# EAGLE board Fortuna-v21-OtherMill (EAGLE 8.1.0)
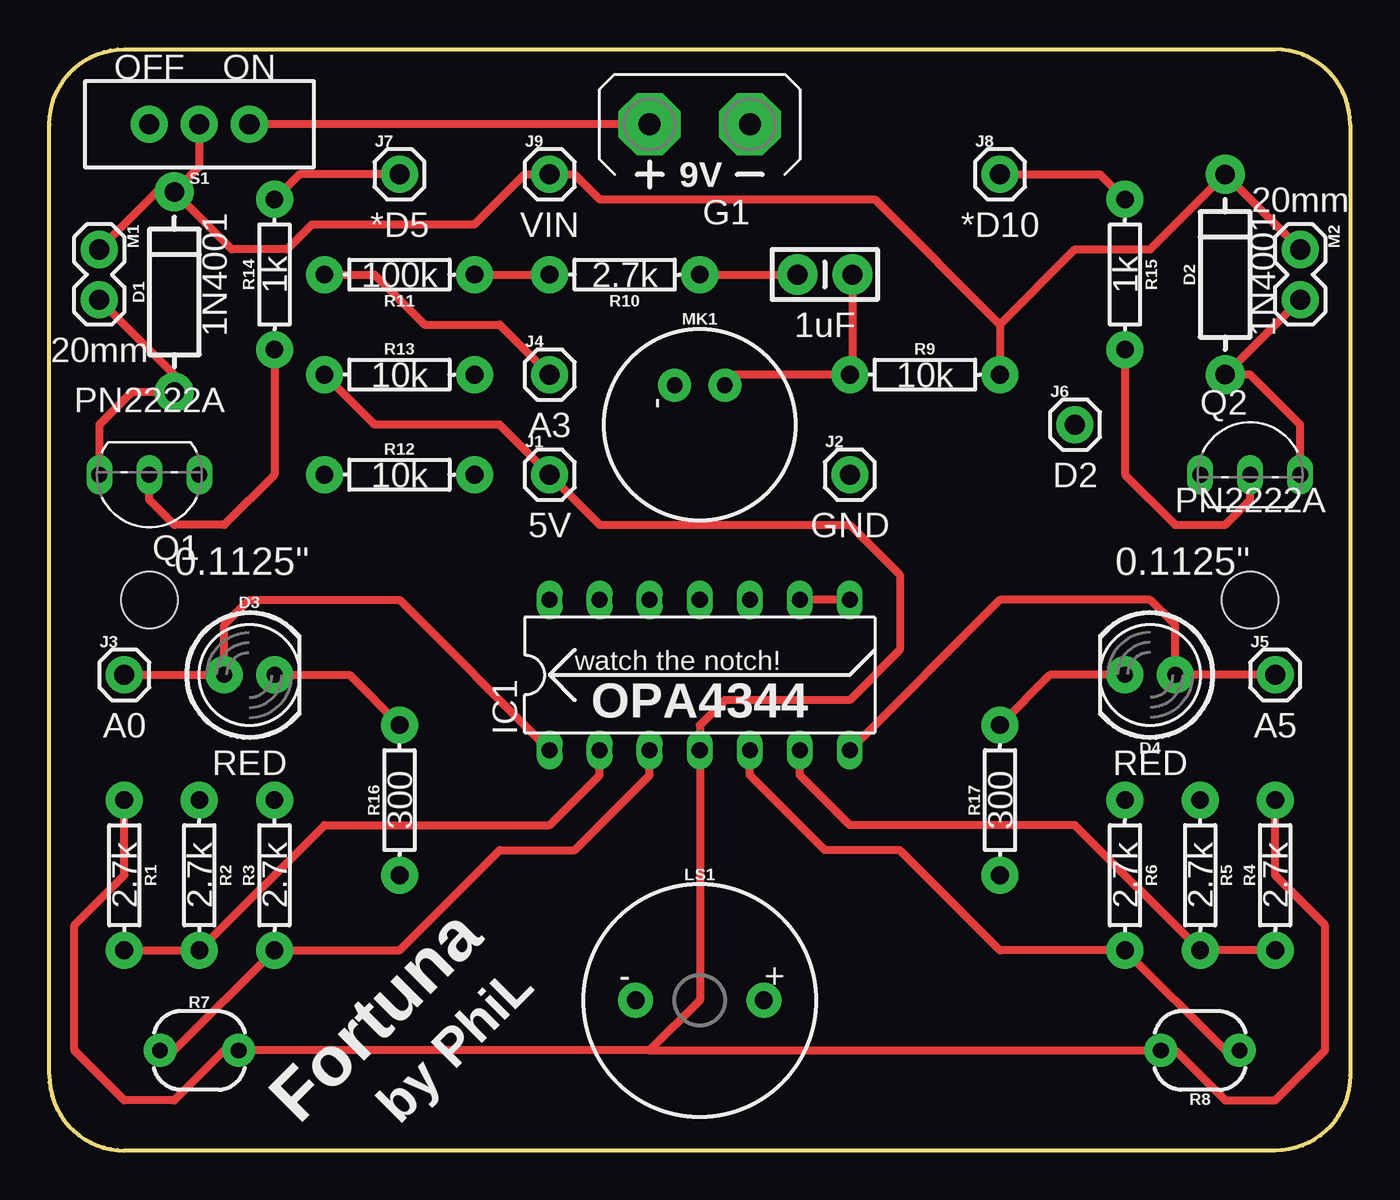
[diagram p0: board, top side]
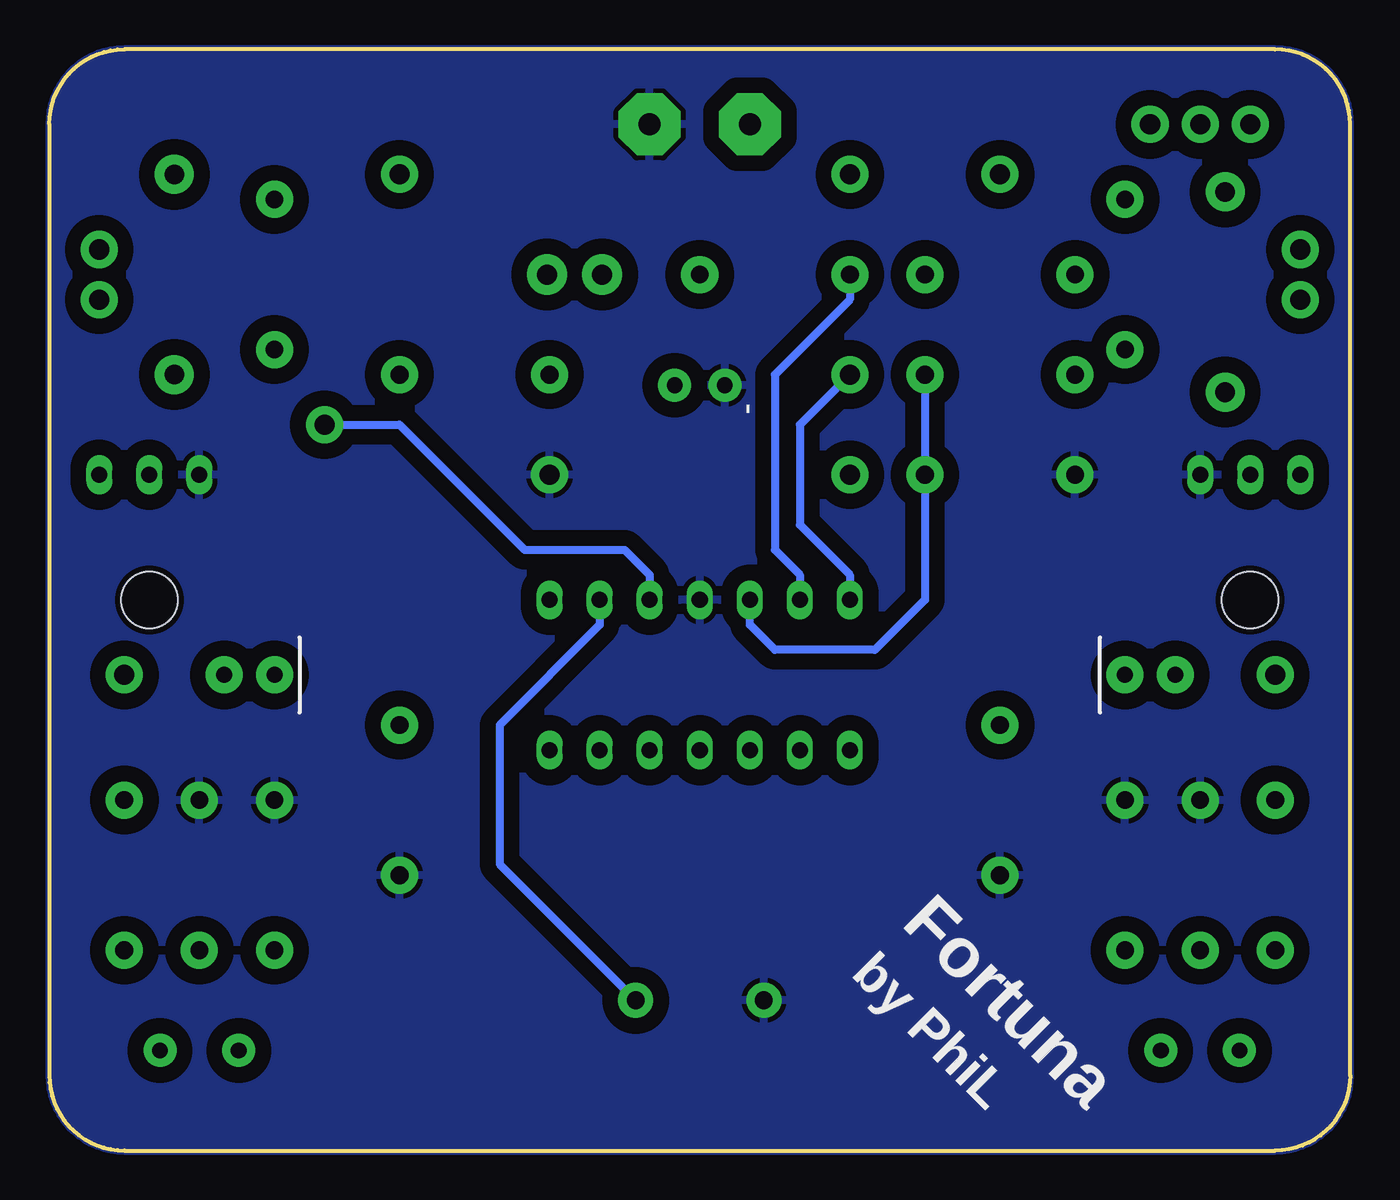
[diagram p1: board, bottom side, seen from below]

Size 66.04 x 55.88 mm. Coordinates in mm from the lower left corner, seen from the top.
Outline: 0,3.81 0,52.07 arc-90 3.81,55.88 62.23,55.88 arc-90 66.04,52.07 66.04,3.81 arc-90 62.23,0 3.81,0 arc-90 0,3.81
Copper layers (1*16): Top 0.035mm / dielectric 1.5mm / Bottom 0.035mm
Design rules "OthermillDRC_1_32_v2": minimum track width 8mil, minimum drill 0.8mm, track to track 0.794003125mm, track to pad 0.794003125mm, pad to pad 0.794003125mm, via to via 0.794003125mm, smd to smd 0mil, copper to edge 0mil, drill to drill 1mil, minimum pad ring 10mil, minimum via ring 10mil, stop-mask expansion 1mil, vias tented up to drill 30mil, thermal gap 10mil
Net classes: 0 default: width 0.406 mm
Holes 2.86 mm at 5.08,27.94 60.96,27.94

## Footprints (pad centres in the part's own frame; a part is rotated, then mirrored left to right if it is on the bottom)
CAP-PTH-SMALL-KIT = drill 1.016 pad 2.032: 1 -1.397,0; 2 1.397,0
DIODE-1N4001 = drill 1 pad 1.981: A -5.08,0; C 5.08,0
LED_5MM = drill 0.813 pad 1.88: A -1.27,0; K 1.27,0
AB9V = drill 1.118 pad 3.15 octagon: + 0,2.54; - 0,-2.54
DIL14 = drill 0.813 long: 1 -7.62,-3.81; 2 -5.08,-3.81; 3 -2.54,-3.81; 4 0,-3.81; 5 2.54,-3.81; 6 5.08,-3.81; 7 7.62,-3.81; 8 7.62,3.81; 9 5.08,3.81; 10 2.54,3.81; 11 0,3.81; 12 -2.54,3.81; 13 -5.08,3.81; 14 -7.62,3.81
1X01 = drill 1.016 pad 1.88: 1 0,0
BUZZER-12MM = drill 0.9 pad 1.778: + 3.25,0; - -3.25,0
1X02 = drill 1.016 pad 1.88: 1 0,0; 2 2.54,0
MICROPHONE-PTH-9.7MM = drill 0.8 pad 1.676: GND -2,-1.27; OUT -2,1.27
TO92-EBC-OVAL = drill 0.813 long: B 0,-1.27; C 2.54,-1.27; E -2.54,-1.27
AXIAL-0.3 = drill 0.9 pad 1.88: P$1 -3.81,0; P$2 3.81,0
PHOTOCELL = drill 0.8 pad 1.676: 1 -2,0; 2 2,0
SWITCH_SPDT_PTH_11.6X4.0MM = drill 1.016 pad 1.88: 1 0,2.54; 2 0,0; 3 0,-2.54

## Placement (x,y rotation side)
C1  1uF  [CAP-PTH-SMALL-KIT]  39.37,44.45 0 top
D1  1N4001  [DIODE-1N4001]  6.35,43.56 90 top
D2  1N4001  [DIODE-1N4001]  59.69,44.45 90 top
D3  LLED_RED  [LED_5MM]  10.16,24.13 0 top
D4  RLED_RED  [LED_5MM]  55.88,24.13 180 top
FRAME1  FRAME-LETTER  [CREATIVE_COMMONS]  0,-7.62 0 top  (outside the outline)
G1  AB9V  [AB9V]  33.02,52.07 90 top
IC1  OPA4340P  [DIL14]  33.02,24.13 0 top
J1  5V  [1X01]  25.4,34.29 0 top
J2  GND  [1X01]  40.64,34.29 0 top
J3  A0  [1X01]  3.81,24.13 0 top
J4  A3  [1X01]  25.4,39.37 0 top
J5  A5  [1X01]  62.23,24.13 0 top
J6  D2  [1X01]  52.07,36.83 0 top
J7  *D5  [1X01]  17.78,49.53 0 top
J8  *D10  [1X01]  48.26,49.53 0 top
J9  VIN  [1X01]  25.4,49.53 0 top
LS1  BUZZER  [BUZZER-12MM]  33.02,7.62 0 top
M1  MOTOR20MM  [1X02]  2.54,45.72 270 top
M2  MOTOR20MM  [1X02]  63.5,45.72 270 top
MK1  MIC  [MICROPHONE-PTH-9.7MM]  33.02,36.83 270 top
Q1  PN2222A  [TO92-EBC-OVAL]  5.08,33.02 180 top
Q2  PN2222A  [TO92-EBC-OVAL]  60.96,35.56 0 top
R1  2.7k  [AXIAL-0.3]  3.81,13.97 270 top
R2  2.7k  [AXIAL-0.3]  7.62,13.97 270 top
R3  2.7k  [AXIAL-0.3]  11.43,13.97 90 top
R4  2.7k  [AXIAL-0.3]  62.23,13.97 90 top
R5  2.7k  [AXIAL-0.3]  58.42,13.97 270 top
R6  2.7k  [AXIAL-0.3]  54.61,13.97 270 top
R7  LPHOTO  [PHOTOCELL]  7.62,5.08 0 top
R8  RPHOTO  [PHOTOCELL]  58.42,5.08 180 top
R9  10k  [AXIAL-0.3]  44.45,39.37 0 top
R10  2.7k  [AXIAL-0.3]  29.21,44.45 180 top
R11  100k  [AXIAL-0.3]  17.78,44.45 180 top
R12  10k  [AXIAL-0.3]  17.78,34.29 0 top
R13  10k  [AXIAL-0.3]  17.78,39.37 0 top
R14  1k  [AXIAL-0.3]  11.43,44.45 90 top
R15  1k  [AXIAL-0.3]  54.61,44.45 270 top
R16  300  [AXIAL-0.3]  17.78,17.78 90 top
R17  300  [AXIAL-0.3]  48.26,17.78 90 top
S1  ON/OFF  [SWITCH_SPDT_PTH_11.6X4.0MM]  7.62,52.07 90 top

## Library data of the parts
C1 = SparkFun-Capacitors; PROD_ID: CAP-08370
D1 D2 = SparkFun-DiscreteSemi; PROD_ID: DIO-09176
D3 D4 = SparkFun-LED
FRAME1 = SparkFun-Aesthetics
G1 = battery
IC1 = burr-brown; OC_FARNELL: unknown; OC_NEWARK: unknown
J1-J9 M1 M2 = SparkFun-Connectors
LS1 = SparkFun-Electromechanical; PROD_ID: COMP-08253; SF_SKU: COM-07950
MK1 = SparkFun-Sensors; PROD_ID: COMP-08856; SF_ID: COM-08635
Q1 Q2 = Adafruit
R1-R6 R9-R17 = SparkFun-Resistors; PROD_ID: RES-08380
R7 R8 = SparkFun-Sensors; PROD_ID: COMP-09129; SF_ID: SEN-09088
S1 = SparkFun-Switches; PROD_ID: SWCH-08261; SF_SKU: COM-00102

## Nets
5V: IC1.4 J1.1 R1.P$1 R4.P$2 R7.2 R8.2 R13.P$1
9V: G1.+ S1.3
+BUZZER: IC1.10 J6.1
+LPHOTO: IC1.3 R3.P$1 R7.1
+MIC: IC1.12 R12.P$2 R13.P$2
+RPHOTO: IC1.5 R6.P$2 R8.1
-LPHOTO: IC1.2 R1.P$2 R2.P$2
-MIC: IC1.13 R10.P$2 R11.P$1
-RPHOTO: IC1.6 R4.P$1 R5.P$2
GND: G1.- IC1.11 J2.1 LS1.- MK1.GND Q1.E Q2.E R2.P$1 R3.P$2 R5.P$1 R6.P$1 R12.P$1 R16.P$1 R17.P$1
N$1: C1.2 MK1.OUT R9.P$1
N$2: C1.1 R10.P$1
N$3: D3.K R16.P$2
N$4: D4.K R17.P$2
N$9: Q1.B R14.P$1
N$10: D1.A M1.2 Q1.C
N$12: D2.A M2.2 Q2.C
N$14: Q2.B R15.P$2
OUT_BUZZER: IC1.8 IC1.9 LS1.+
OUT_LMOTOR: J7.1 R14.P$2
OUT_LPHOTO: D3.A IC1.1 J3.1
OUT_MIC: IC1.14 J4.1 R11.P$2
OUT_RMOTOR: J8.1 R15.P$1
OUT_RPHOTO: D4.A IC1.7 J5.1
VCC: D1.C D2.C J9.1 M1.1 M2.1 R9.P$2 S1.2

## Tracks (layer width: path | path; a pad name or v marks a point on that pad's centre or on a via)
5V
  Top 0.406: R13.P$1 16.51,36.83 22.86,36.83 J1.1 27.94,31.75 40.64,31.75 43.18,29.21 43.18,25.4 40.64,22.86 34.29,22.86 33.02,21.59 IC1.4 33.02,7.62 30.48,5.08 | R1.P$1 3.81,13.97 1.27,11.43 1.27,5.08 3.81,2.54 6.35,2.54 8.89,5.08 R7.2 30.48,5.08 | R4.P$2 62.23,13.97 64.77,11.43 64.77,5.08 62.23,2.54 59.69,2.54 57.15,5.08 R8.2 30.48,5.08
9V
  Top 0.406: G1.+ S1.3
+BUZZER
  Bottom 0.406: J6.1 48.26,36.83 41.91,30.48 36.83,30.48 35.56,29.21 IC1.10
+LPHOTO
  Top 0.406: R7.1 6.35,5.08 R3.P$1 17.78,10.16 22.86,15.24 26.67,15.24 30.48,19.05 IC1.3
+MIC
  Bottom 0.406: R13.P$2 R12.P$2 21.59,27.94 24.13,25.4 29.21,25.4 30.48,26.67 IC1.12
+RPHOTO
  Top 0.406: IC1.5 35.56,19.05 39.37,15.24 43.18,15.24 48.26,10.16 R6.P$2 59.69,5.08 R8.1
-LPHOTO
  Top 0.406: R1.P$2 R2.P$2 13.97,16.51 25.4,16.51 27.94,19.05 IC1.2
-MIC
  Top 0.406: R11.P$1 R10.P$2
  Bottom 0.406: R10.P$2 25.4,43.18 29.21,39.37 29.21,30.48 27.94,29.21 IC1.13
-RPHOTO
  Top 0.406: R4.P$1 R5.P$2 52.07,16.51 40.64,16.51 38.1,19.05 IC1.6
GND
  pour Bottom (isolate 0.305): 0,3.81 0,52.07 arc-90 3.81,55.88 62.23,55.88 arc-90 66.04,52.07 66.04,3.81 arc-90 62.23,0 3.81,0 arc-90
N$1
  Top 0.406: C1.2 40.77,39.5 R9.P$1 34.83,39.37 MK1.OUT
N$2
  Top 0.406: R10.P$1 C1.1
N$3
  Top 0.406: D3.K 15.24,24.13 R16.P$2
N$4
  Top 0.406: D4.K 50.8,24.13 R17.P$2
N$9
  Top 0.406: R14.P$1 11.43,34.29 8.89,31.75 6.35,31.75 5.08,33.02 Q1.B
N$10
  Top 0.406: M1.2 6.35,39.37 D1.A 4.19,38.48 2.54,36.83 Q1.C
N$12
  Top 0.406: M2.2 D2.A 60.96,39.37 63.5,36.83 Q2.C
N$14
  Top 0.406: R15.P$2 54.61,34.29 57.15,31.75 59.69,31.75 60.96,33.02 Q2.B
OUT_BUZZER
  Top 0.406: IC1.8 IC1.9
  Bottom 0.406: IC1.9 38.1,26.67 43.18,21.59 43.18,14.53 LS1.+
OUT_LMOTOR
  Top 0.406: J7.1 12.7,49.53 R14.P$2
OUT_LPHOTO
  Top 0.406: J3.1 D3.A 8.89,26.67 10.16,27.94 17.78,27.94 IC1.1
OUT_MIC
  Top 0.406: R11.P$2 16.51,44.45 19.05,41.91 22.86,41.91 J4.1
  Bottom 0.406: 25.4,38.73 J4.1 27.94,36.83 27.94,31.75 25.4,29.21 IC1.14
OUT_RMOTOR
  Top 0.406: J8.1 53.34,49.53 R15.P$1
OUT_RPHOTO
  Top 0.406: J5.1 D4.A 57.15,26.67 55.88,27.94 48.26,27.94 IC1.7
VCC
  Top 0.406: 48.26,41.91 41.91,48.26 27.94,48.26 26.67,49.53 J9.1 24.13,49.53 21.59,46.99 13.34,46.99 12.06,45.72 9.27,45.72 D1.C | 48.26,41.91 R9.P$2 | 48.26,41.91 52.07,45.72 55.88,45.72 D2.C M2.1 | S1.2 7.62,49.91 D1.C | D1.C 5.46,48.64 M1.1

## Text on the board
tPlace: OFF | ON | 20mm | *D5 | VIN | *D10 | 1N4001 | 1k | 100k | 2.7k | 1k | 1N4001 | 1uF | 20mm | 10k | 10k | PN2222A | A3 | 10k | D2 | PN2222A | 5V | GND | 0.1125" | 0.1125" | watch the notch! | OPA4344 | A0 | A5 | RED | RED | 300 | 300 | 2.7k | 2.7k | 2.7k | 2.7k | 2.7k | 2.7k | - | + | Fortuna | by PhiL
bPlace: Fortuna | by PhiL
tDocu: Phi Luu